# Altium PCB PCB2.PcbDoc
Units mil, origin at the board's own origin, x right, y up, seen from the top; angles counter-clockwise.
Board outline 6000 x 4000 mil, 2 copper layers (Top Layer, Bottom Layer); 72 components, 143 nets, 481 pads, 208 vias.
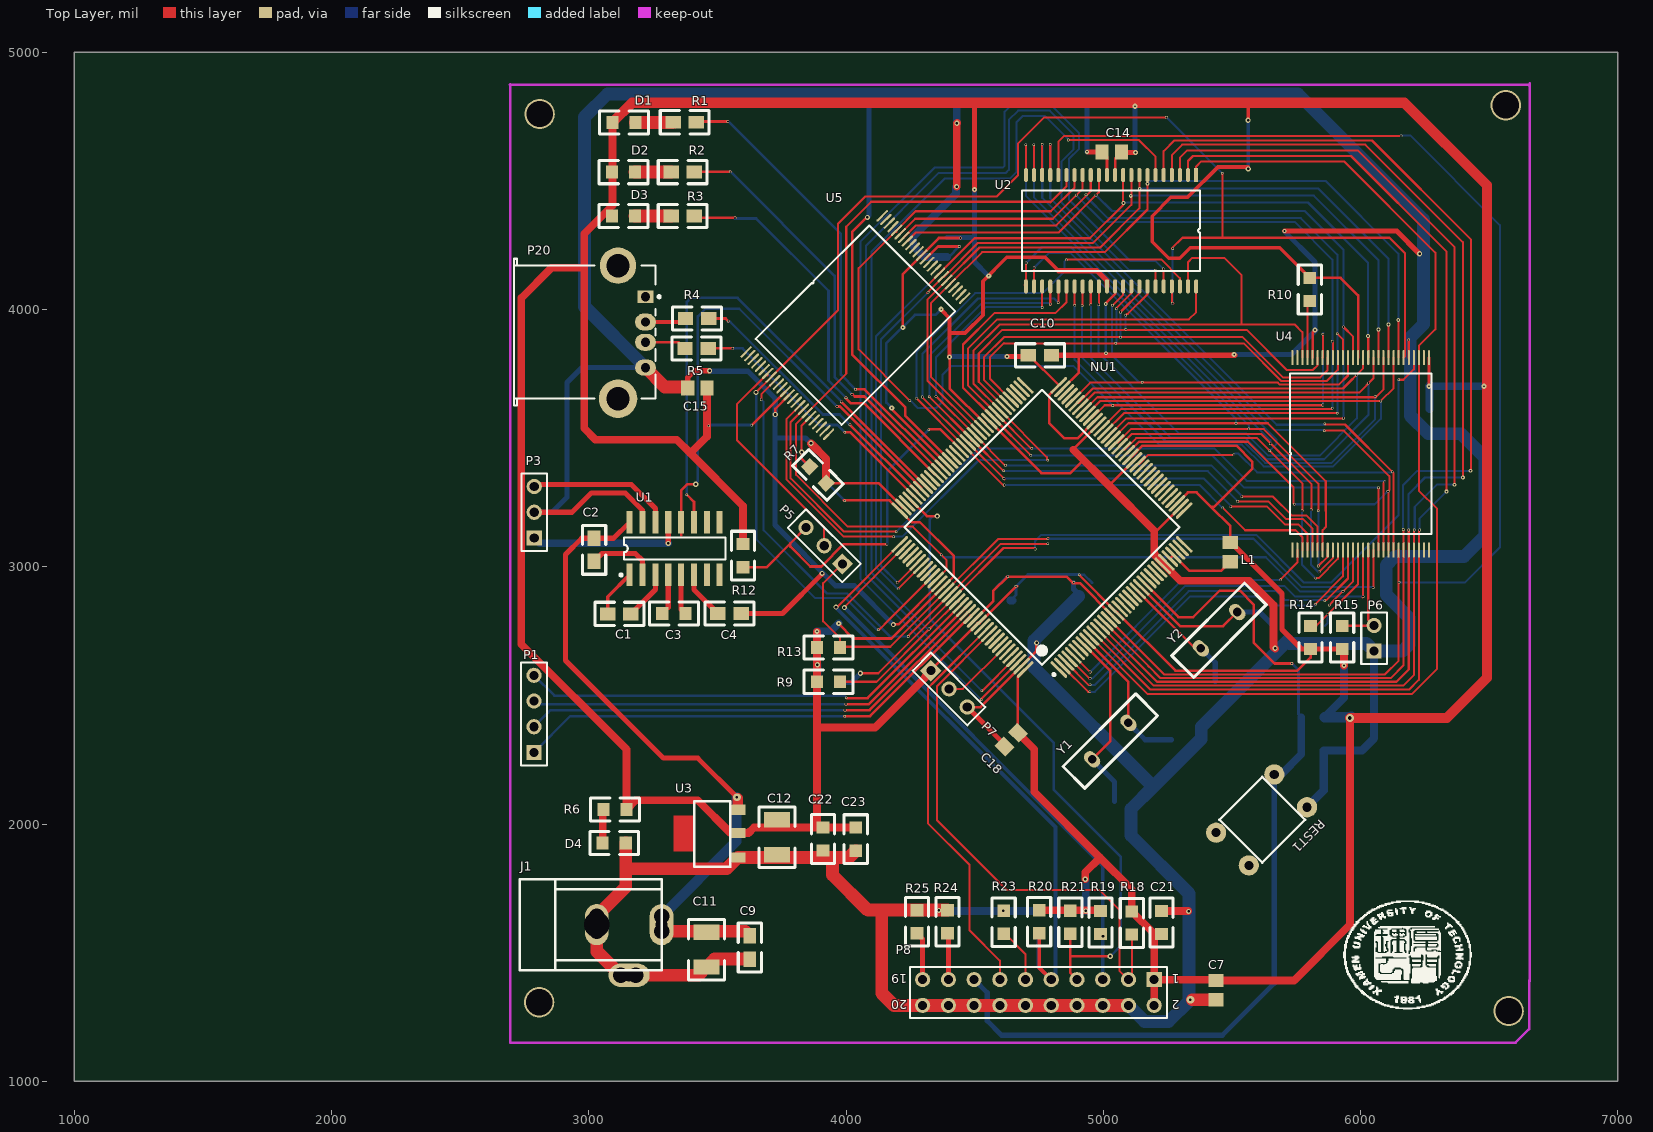
[diagram p0: Top Layer view]
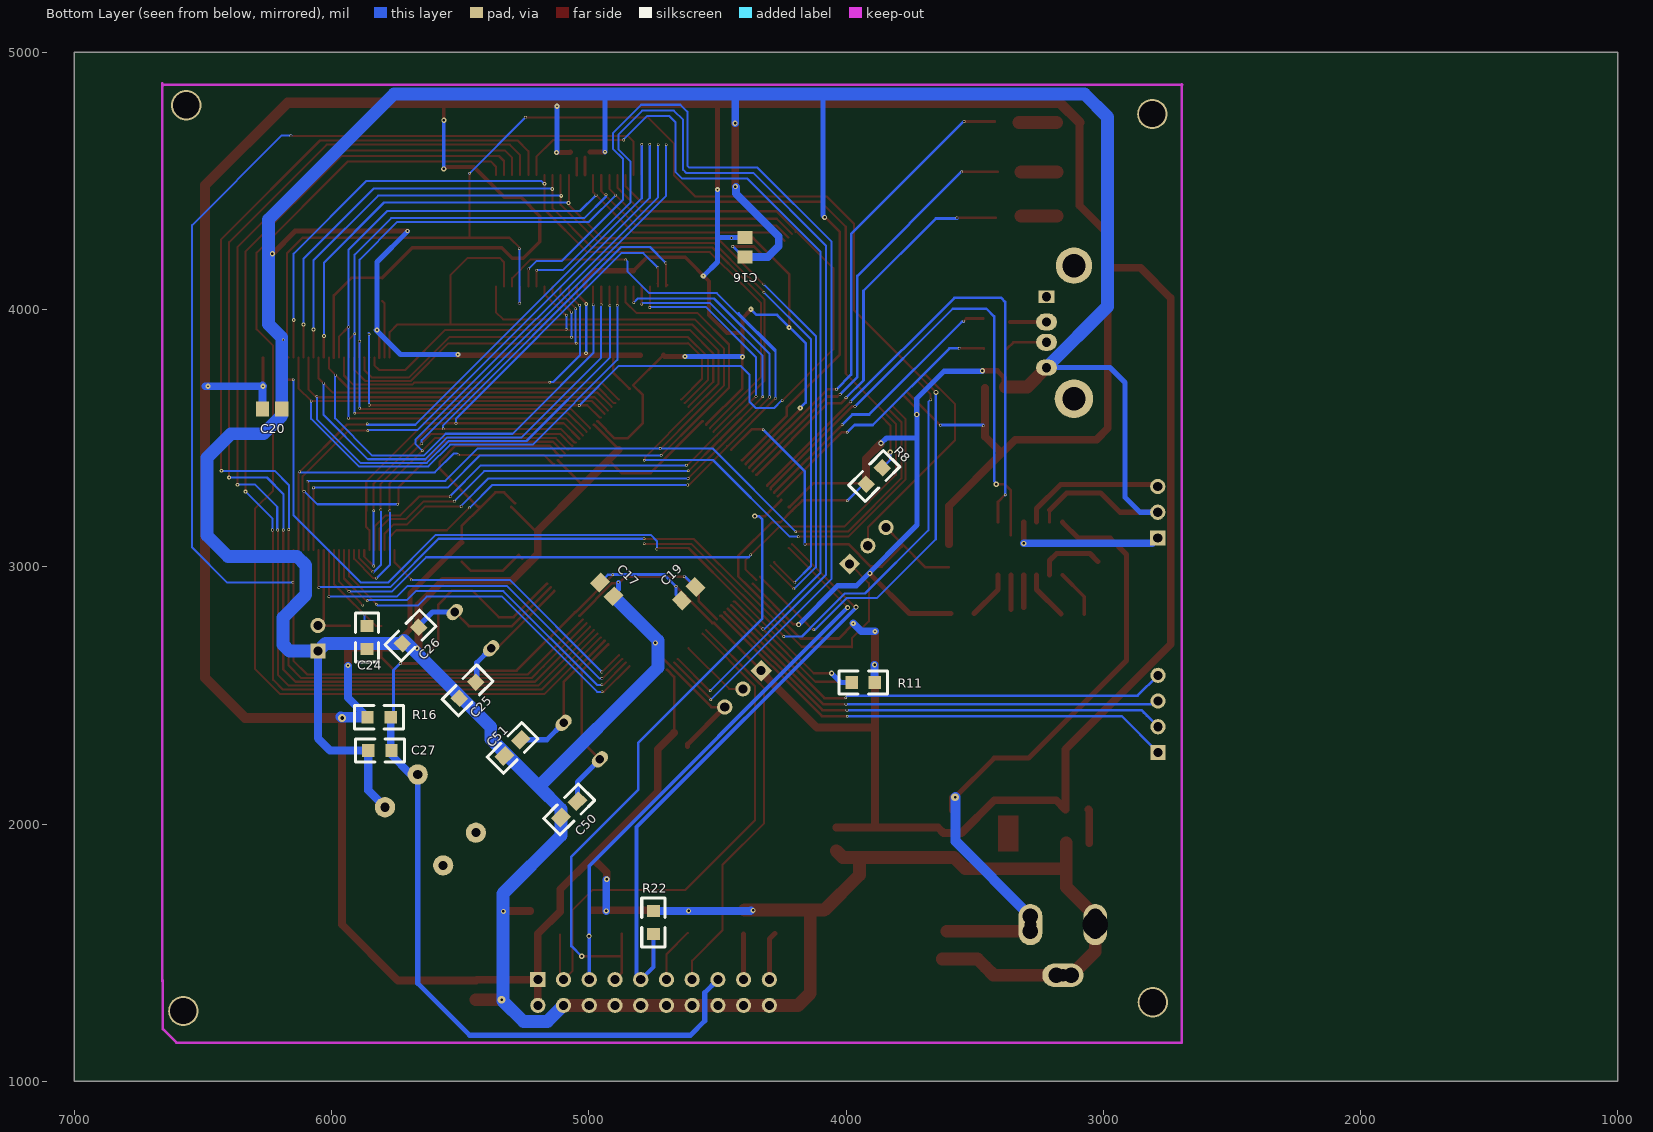
[diagram p1: Bottom Layer view, seen from below]

## Layer stack, top to bottom
Top Layer: signal copper 1.4
Dielectric: core 12.6, FR-4, Dk 4.8
Bottom Layer: signal copper 1.4

## Board outline
1000,1000 7000,1000 7000,5000 1000,5000

## Design rules (kind name [scope] priority, off if disabled: settings)
Clearance [All] p1: gap=6
FabricationTestPointUsage TestPointUsage [All] p1: valid=0 allowmultiple=FALSE
FabricationTestpoint Testpoint [All] p1: side=3 testpointundercomponent=TRUE minsize=40 maxsize=100 preferedsize=60 minholesize=0 maxholesize=40 preferedholesize=32 testpointgrid=1 allowsidetop=TRUE allowsidebottom=TRUE usegrid=TRUE gridtolerance=0.01
PolygonConnect [All] p1: connectstyle=Relief reliefconductorwidth=10 reliefentries=4 polygonreliefangle="90 Angle" airgapwidth=10
RoutingVias [All] p1: holewidth=28 width=50 viastyle="Through Hole" minholewidth=28 minwidth=50 maxholewidth=28 maxwidth=50
SolderMaskExpansion [All] p1: expansion=4
Width [All] p1: maxlimit=50 minlimit=6 preferedwidth=10 minimp=50.000000 maximp=50.000000 favimp=50.000000
26 further rules are at their usual default settings.

## Classes and differential pairs
net class R3_Nets: NetD3_2 PC8
net class R2_Nets: NetD2_2 PC7
net class R1_Nets: NetD1_2 PC6
net class R19_Nets: PA15 VDD33
net class U4_Nets: A0 A1 A2 A3 A4 A5 A6 A7 A8 A9 A10 A11 A12 A13 A14 A15 A16 A17 A18 A19 A20 A21 A22 D0 D1 D2 D3 D4 D5 D6 D7 D8 D9 D10 D11 D12 D13 D14 D15 GND NetC24_1 NetP6_2 NetR10_1 NetU4_1 NetU4_27 NetU4_28 NetU4_30 NetU4_55 NetU4_56 PD4 PD5 PD6 PG9 VDD33
net class D[0..15]: AD0 AD1 AD2 AD3 AD4 AD5 AD6 AD7 AD8 AD9 AD10 AD11 AD12 AD13 AD14 AD15 AD16 AD17 AD18 AD19 AD20 AD21 AD22 AD23 D0 D1 D2 D3 D4 D5 D6 D7 D8 D9 D10 D11 D12 D13 D14 D15 DATA0 DATA1 DATA2 DATA3 DATA4 DATA5 DATA6 DATA7 DATA8 DATA9 DATA10 DATA11 DATA12 DATA13 DATA14 DATA15 NetU4_1 NetU4_27 NetU4_28 NetU4_30 NetU4_55 NetU4_56
net class U5_Nets: A16 A17 D0 D1 D2 D3 D4 D5 D6 D7 GND NetP5_2 NetR7_1 PD4 PD5 PD7 VDD33
net class A[0..23]: A0 A1 A2 A3 A4 A5 A6 A7 A8 A9 A10 A11 A12 A13 A14 A15 A16 A17 A18 A19 A20 A21 A22 A23 NetU4_1 NetU4_27 NetU4_28 NetU4_30 NetU4_55 NetU4_56
net class U3_Nets: GND VDD5 VDD33
net class U2_Nets: A0 A1 A2 A3 A4 A5 A6 A7 A8 A9 A10 A11 A12 A13 A14 A15 A16 A17 A18 D0 D1 D2 D3 D4 D5 D6 D7 D8 D9 D10 D11 D12 D13 D14 D15 GND PD4 PD5 PE0 PE1 PG10 VDD33
net class REST1_Nets: GND NRST
net class R25_Nets: GND NetP8_19
net class R24_Nets: GND NetP8_17
net class R23_Nets: GND NetP8_11
net class R22_Nets: GND PA14
net class R21_Nets: PA13 VDD33
net class R20_Nets: PA14 VDD33
net class R18_Nets: PB4 VDD33
net class R16_Nets: NRST VDD33
net class R15_Nets: NetP6_2 VDD33
net class R14_Nets: NetC24_1 VDD33
net class R13_Nets: PD6 VDD33
net class R12_Nets: PG6 VDD33
net class R11_Nets: PG9 VDD33
net class R10_Nets: NetR10_1 VDD33
net class R9_Nets: PG10 VDD33
net class R8_Nets: NetR7_1 VDD33
net class R7_Nets: GND NetR7_1
net class R6_Nets: NetD4_1 VDD33
net class R5_Nets: NetP20_3 PA12
net class R4_Nets: NetP20_2 PA11
net class P20_Nets: GND NetP20_2 NetP20_3 NetP20_5 NetP20_6 "USB 5V"
net class P8_Nets: GND NetP8_11 NetP8_17 NetP8_19 NRST PA13 PA14 PA15 PB3 PB4 VDD33
net class P7_Nets: BOOT0 GND VDD33
net class P6_Nets: GND NetP6_2
net class P5_Nets: NetP5_2 PD6 PG6
net class P3_Nets: GND R1IN T1OUT
net class NU1_Nets: A0 A1 A2 A3 A4 A5 A6 A7 A8 A9 A10 A11 A12 A13 A14 A15 A16 A17 A18 A19 A20 A21 A22 A23 BOOT0 D0 D1 D2 D3 D4 D5 D6 D7 D8 D9 D10 D11 D12 D13 D14 D15 GND LED0 LED1 LED2 NetL1_1 NetNU1_6 NetNU1_106 NRST OSCIN OSCOUT PA0 PA1 PA2 PA3 PA4 PA5 PA6 PA7 PA8 PA9 PA10 PA11 PA12 PA13 PA14 PA15 PB0 PB1 PB2 PB3 PB4 PB5 PB6 PB7 PB8 PB9 PB10 PB11 PB12 PB13 PB14 PB15 PC0 PC1 PC2 PC3 PC4 PC5 PC6 PC7 PC8 PC9 PC10 PC11 PC12 PC13 PC14 PC15 PD2 PD3 PD4 PD5 PD6 PD7 PE0 PE1 PF6 PF10 PF11 PG6 PG7 PG8 PG9 PG10 PG11 PG12 PG13 PG14 PG15 VDD33
net class L1_Nets: NetL1_1 VDD33
net class J1_Nets: GND VDD5
net class D4_Nets: GND NetD4_1
net class D3_Nets: NetD3_2 VDD33
net class D2_Nets: NetD2_2 VDD33
net class D1_Nets: NetD1_2 VDD33
net class C27_Nets: GND NRST
net class C25_Nets: GND OSCIN
net class C24_Nets: GND NetC24_1
net class C23_Nets: GND VDD33
net class C22_Nets: GND VDD33
net class C21_Nets: GND VDD33
net class C20_Nets: GND VDD33
net class C19_Nets: GND VDD33
net class C18_Nets: GND VDD33
net class C17_Nets: GND VDD33
net class C16_Nets: GND VDD33
net class C15_Nets: GND VDD33
net class C14_Nets: GND VDD33
net class C12_Nets: GND VDD33
net class C11_Nets: GND VDD5
net class C10_Nets: GND VDD33
net class C9_Nets: GND VDD5
net class C7_Nets: GND VDD33
net class C3_Nets: NetC3_1 NetC3_2
net class C1_Nets: NetC1_1 NetC1_2
component class "XLAT AND JTAG": C25 C26 C27 P7 P8 R16 R18 R19 R20 R21 R22 R23 R24 R25 REST1 Y2
component class STORAGE: C21 C22 C23 C24 P5 P6 R7 R8 R9 R10 R11 R12 R13 R14 R15 U2 U4 U5
component class POWER: C7 C9 C10 C11 C12 C14 C15 C16 C17 C18 C19 C20 D4 J1 L1 NU1 R6 U3
component class EXTERN: 1 C1 C2 C3 C4 D1 D2 D3 P1 P3 P20 R1 R2 R3 R4 R5 U1
net class C2_Nets: NetC2_2 VDD5
net class C4_Nets: GND NetC4_1
net class U1_Nets: GND NetC1_1 NetC1_2 NetC2_2 NetC3_1 NetC3_2 NetC4_1 NetU1_7 NetU1_8 NetU1_9 NetU1_10 PA9 PA10 R1IN T1OUT VDD5
net class C26_Nets: GND OSCOUT
net class Y2_Nets: OSCIN OSCOUT
component class GPIO_OUT: C50 C51 Y1
net class C50_Nets: GND PC14
net class C51_Nets: GND PC15
net class Y1_Nets: PC14 PC15
net class P1_Nets: PG11 PG12 PG13 PG14

## Components (designator, comment, footprint, x,y, rotation, side; value= is the part's Value field where it differs from the comment)
C1 "0.1uF" 0805#1 3074,2817 r0 top
C2 "0.1uF" 0805#1 3021,3111 r270 top
C3 "0.1uF" 0805#2 3376,2818 r180 top
C4 "0.1uF" 0805#1 3502,2818 r0 top
C7 "Cap" 6-0805 5438,1354 r90 top
C9 "102" 0805#1 3626,1565 r270 top
C10 "102" 0805#1 4709,3822 r0 top
C11 "2.2uf" 1210 3458,1579 r270 top
C12 "2.2uf" 1210 3732,2016 r270 top
C14 "Cap" 6-0805 5033,4612 r0 top
C15 "Cap" 6-0805 3422,3695 r0 top
C16 "Cap" 6-0805 4393,4242 r90 bottom
C17 "Cap" 6-0805 4930,2912 r45 bottom
C18 "Cap" 6-0805 4642,2328 r45 top
C19 "Cap" 6-0805 4612,2895 r315 bottom
C20 "Cap" 6-0805 6231,3613 r0 bottom
C21 "Cap" 0805#2 5227,1572 r90 top
C22 "Cap" 0805#2 3911,1987 r270 top
C23 "Cap" 0805#2 4038,1986 r270 top
C24 "Cap" 0805#2 5862,2770 r270 bottom
C25 "Cap" 0805#2 5503,2488 r135 bottom
C26 "Cap" 0805#2 5725,2701 r135 bottom
C27 "Cap" 0805#2 5857,2286 r180 bottom
C50 "Cap" 0805#1 5108,2025 r135 bottom
C51 "Cap" 0805#1 5328,2264 r135 bottom
D1 "LED0" 0805#2 3092,4727 r0 top
D2 "LED0" 0805#2 3090,4534 r0 top
D3 "LED0" 0805#2 3090,4364 r0 top
D4 "LED3" 0805#2 3054,1926 r0 top
J1 "PWR2.5" Power_In 3013,1699 r0 top
L1 "Inductor" 6-0805 5494,3057 r90 top
NU1 "STM32F103ZET6" LQFN144 4762,3153 r135 top
P1 "Header 4" HDR1X4 2787,2278 r90 top
P3 "Header 3" HDR1X3 2788,3112 r90 top
P5 "Header 3" HDR1X3 3986,3011 r135 top
P6 "Header 2" HDR1X2 6053,2672 r90 top
P7 "Header 3" HDR1X3 4330,2596 r315 top
P8 "Header 10X2" HDR2X10 5198,1395 r180 top
P20 "P10" 787616 2709,3912 r180 top
R1 "Res2" 0805#1 3418,4728 r180 top
R2 "Res2" 0805#1 3410,4534 r180 top
R3 "Res2" 0805#1 3410,4364 r180 top
R4 "Res2" 0805#1 3376,3965 r0 top
R5 "Res2" 0805#1 3374,3848 r0 top
R6 "Res2" 0805#2 3057,2056 r0 top
R7 "Res2" 0805#2 3859,3389 r315 top
R8 "Res2" 0805#2 3922,3321 r135 bottom
R9 "Res2" 0805#2 3977,2553 r180 top
R10 "Res2" 0805#2 5803,4033 r90 top
R11 "Res2" 0805#2 3978,2550 r180 bottom
R12 "Res2" 0805#2 3600,2998 r90 top
R13 "Res2" 0805#2 3887,2686 r0 top
R14 "Res2" 0805#2 5806,2680 r90 top
R15 "Res2" 0805#2 5929,2680 r90 top
R16 "Res2" 0805#2 5770,2415 r0 bottom
R18 "Res2" 0805#2 5111,1570 r90 top
R19 "Res2" 0805#2 4989,1572 r90 top
R20 "Res2" 0805#2 4751,1575 r90 top
R21 "Res2" 0805#2 4872,1573 r90 top
R22 "Res2" 0805#2 4749,1572 r90 bottom
R23 "Res2" 0805#2 4613,1573 r90 top
R24 "Res2" 0805#2 4395,1575 r90 top
R25 "Res2" 0805#2 4276,1575 r90 top
REST1 "SW_PB" SWPB 5566,1839 r225 top
U1 "MAX232-2" SOIC16 3334,3071 r0 top
U2 "IS61LV51216-10T" TSOP44 5361,4523 r270 top
U3 "LM1117-3.3" SOT-223 3410,1833 r90 top
U4 "M29W128GL" TSOP56 5735,3065 r90 top
U5 "NAND512W3A2CN6E" TSOP48 3612,3835 r45 top
Y1 "XTAL" XTAL-1 5098,2393 r225 top
Y2 "XTAL" XTAL-1 5521,2824 r225 top
? "" BMP1 5935,1705 r0 top

## Footprints (in the part's own frame and the unit in brackets; to place one, negate y for a bottom-side part, rotate by r counter-clockwise, add the part's x,y. Pads: shape width x height; smd on the part's side, far side on the other; paste and mask are expansions set on the pad)
6-0805 [mm] "Chip Resistor; Body 2.0 x 1.3 mm (LxW typ)"
  rect 1.3x1.5 smd: 1(-0.95,0) 2(0.95,0)
0805#1 [mil]
  rect 60x50 smd: 1(0,0) 2(90,0)
  silkscreen extent -50,-45 140,45
0805#2 [mil]
  rect 47.37x50 smd: 1(0,0) 2(90,0)
  silkscreen extent -50,-45 140,45
1210 [mil]
  rect 60x100 smd: 1(0,0) 2(135,0)
  silkscreen extent -50,-70 185,70
787616 [mm] "Connector; USB1.1, Type A, Thru-Hole; 4 Position; Right Angle"
  rect 1.606x1.2 hole 0.92: 1(-12.99,-3.5)
  oval 2.057x1.676 hole 0.92: 2(-12.99,-1) 3(-12.99,1)
  oval 2.057x1.6 hole 0.92: 4(-12.99,3.5)
  round 3.8 hole 2.3: 5(-10.28,6.57)
  round 3.6 hole 2.3: 6(-10.28,-6.57)
  silkscreen extent -14.47,-7.25 0,7.25
BMP1 [mil]
  silkscreen extent 0,-424 498,-4
HDR1X2 [mm] "Connector; Header; 2 Position"
  rect 1.5x1.5 hole 0.9: 1(0,0)
  round 1.5 hole 0.9: 2(2.54,0)
  silkscreen extent -1.27,-1.27 3.81,1.27
HDR1X3 [mm] "Connector; Header; 3 Position"
  rect 1.5x1.5 hole 0.9: 1(0,0)
  round 1.5 hole 0.9: 2(2.54,0) 3(5.08,0)
  silkscreen extent -1.27,-1.27 6.35,1.27
HDR1X4 [mm] "Connector; Header; 4 Position"
  rect 1.5x1.5 hole 0.9: 1(0,0)
  round 1.5 hole 0.9: 2(2.54,0) 3(5.08,0) 4(7.62,0)
  silkscreen extent -1.27,-1.27 8.89,1.27
HDR2X10 [mm] "Connector; Header; 10x2 Position"
  rect 1.5x1.5 hole 0.9: 1(0,0)
  round 1.5 hole 0.9: 2(0,2.54) 3(2.54,0) 4(2.54,2.54) 5(5.08,0) 6(5.08,2.54) 7(7.62,0) 8(7.62,2.54) 9(10.16,0) 10(10.16,2.54) 11(12.7,0) 12(12.7,2.54) 13(15.24,0) 14(15.24,2.54) 15(17.78,0) 16(17.78,2.54) 17(20.32,0) 18(20.32,2.54) 19(22.86,0) 20(22.86,2.54)
  silkscreen extent -1.27,-1.27 24.13,3.81
LQFN144 [mm] "TSQFP, 144-Leads, Body 23.8x23.8mm (max), Pitch 0.50mm, IPC Medium Density"
  oval 2.2x0.3 smd: 1(-11.1,8.75) 2(-11.1,8.25) 3(-11.1,7.75) 4(-11.1,7.25) 5(-11.1,6.75) 6(-11.1,6.25) 7(-11.1,5.75) 8(-11.1,5.25) 9(-11.1,4.75) 10(-11.1,4.25) 11(-11.1,3.75) 12(-11.1,3.25) 13(-11.1,2.75) 14(-11.1,2.25) 15(-11.1,1.75) 16(-11.1,1.25) 17(-11.1,0.75) 18(-11.1,0.25) 19(-11.1,-0.25) 20(-11.1,-0.75) 21(-11.1,-1.25) 22(-11.1,-1.75) 23(-11.1,-2.25) 24(-11.1,-2.75) 25(-11.1,-3.25) 26(-11.1,-3.75) 27(-11.1,-4.25) 28(-11.1,-4.75) 29(-11.1,-5.25) 30(-11.1,-5.75) 31(-11.1,-6.25) 32(-11.1,-6.75) 33(-11.1,-7.25) 34(-11.1,-7.75) 35(-11.1,-8.25) 36(-11.1,-8.75) 73(11.1,-8.75) 74(11.1,-8.25) 75(11.1,-7.75) 76(11.1,-7.25) 77(11.1,-6.75) 78(11.1,-6.25) 79(11.1,-5.75) 80(11.1,-5.25) 81(11.1,-4.75) 82(11.1,-4.25) 83(11.1,-3.75) 84(11.1,-3.25) 85(11.1,-2.75) 86(11.1,-2.25) 87(11.1,-1.75) 88(11.1,-1.25) 89(11.1,-0.75) 90(11.1,-0.25) 91(11.1,0.25) 92(11.1,0.75) 93(11.1,1.25) 94(11.1,1.75) 95(11.1,2.25) 96(11.1,2.75) 97(11.1,3.25) 98(11.1,3.75) 99(11.1,4.25) 100(11.1,4.75) 101(11.1,5.25) 102(11.1,5.75) 103(11.1,6.25) 104(11.1,6.75) 105(11.1,7.25) 106(11.1,7.75) 107(11.1,8.25) 108(11.1,8.75)
  oval 0.3x2.2 smd: 37(-8.75,-11.1) 38(-8.25,-11.1) 39(-7.75,-11.1) 40(-7.25,-11.1) 41(-6.75,-11.1) 42(-6.25,-11.1) 43(-5.75,-11.1) 44(-5.25,-11.1) 45(-4.75,-11.1) 46(-4.25,-11.1) 47(-3.75,-11.1) 48(-3.25,-11.1) 49(-2.75,-11.1) 50(-2.25,-11.1) 51(-1.75,-11.1) 52(-1.25,-11.1) 53(-0.75,-11.1) 54(-0.25,-11.1) 55(0.25,-11.1) 56(0.75,-11.1) 57(1.25,-11.1) 58(1.75,-11.1) 59(2.25,-11.1) 60(2.75,-11.1) 61(3.25,-11.1) 62(3.75,-11.1) 63(4.25,-11.1) 64(4.75,-11.1) 65(5.25,-11.1) 66(5.75,-11.1) 67(6.25,-11.1) 68(6.75,-11.1) 69(7.25,-11.1) 70(7.75,-11.1) 71(8.25,-11.1) 72(8.75,-11.1) 109(8.75,11.1) 110(8.25,11.1) 111(7.75,11.1) 112(7.25,11.1) 113(6.75,11.1) 114(6.25,11.1) 115(5.75,11.1) 116(5.25,11.1) 117(4.75,11.1) 118(4.25,11.1) 119(3.75,11.1) 120(3.25,11.1) 121(2.75,11.1) 122(2.25,11.1) 123(1.75,11.1) 124(1.25,11.1) 125(0.75,11.1) 126(0.25,11.1) 127(-0.25,11.1) 128(-0.75,11.1) 129(-1.25,11.1) 130(-1.75,11.1) 131(-2.25,11.1) 132(-2.75,11.1) 133(-3.25,11.1) 134(-3.75,11.1) 135(-4.25,11.1) 136(-4.75,11.1) 137(-5.25,11.1) 138(-5.75,11.1) 139(-6.25,11.1) 140(-6.75,11.1) 141(-7.25,11.1) 142(-7.75,11.1) 143(-8.25,11.1) 144(-8.75,11.1)
  silkscreen extent -11.22,-9.6 9.6,9.6, body extent -10,-10 10,10, height 1.6
Power_In [mil]
  rect 60x60 hole 60: 1(270,-116) 2(170,-287) 3(18,-57)
  oval 92x160 hole 47: 1(270,-90)
  rect 50x60 hole 60: 1(270,-57) 3(18,-116)
  rect 60x50 hole 60: 2(111,-287)
  oval 160x92 hole 47: 2(144,-287)
  oval 92x160 hole 100: 3(18,-90)
  silkscreen extent -281,-267 270,87
SOIC16 [mm]
  rect 0.6x2.2 smd: 1(-4.445,-2.6) 2(-3.175,-2.6) 3(-1.905,-2.6) 4(-0.635,-2.6) 5(0.635,-2.6) 6(1.905,-2.6) 7(3.175,-2.6) 8(4.445,-2.6) 9(4.445,2.6) 10(3.175,2.6) 11(1.905,2.6) 12(0.635,2.6) 13(-0.635,2.6) 14(-1.905,2.6) 15(-3.175,2.6) 16(-4.445,2.6)
  silkscreen extent -5.42,-2.72 5,1.1
SOT-223 [mm]
  rect 1x1.5 smd: 1(0.95,-4.31) 2(3.35,-4.31) 3(5.65,-4.31)
  Top Layer region: 1.524,0 5.08,0 5.08,2.032 1.524,2.032
  silkscreen extent 0,-3.56 6.5,0
SWPB [mm]
  round 2 hole 0.9: 1(-8.128,0) 2(-8.128,-4.572) 3(0,-4.572) 4(0,0)
  silkscreen extent -7.13,-5.25 -1.13,0.75
TSOP44 [mm]
  rect 1.4x0.4 smd: 1(0,0)
  oval 1.4x0.4 smd: 2(0,-0.8) 3(0,-1.6) 4(0,-2.4) 5(0,-3.2) 6(0,-4) 7(0,-4.8) 8(0,-5.6) 9(0,-6.4) 10(0,-7.2) 11(0,-8) 12(0,-8.8) 13(0,-9.6) 14(0,-10.4) 15(0,-11.2) 16(0,-12) 17(0,-12.8) 18(0,-13.6) 19(0,-14.4) 20(0,-15.2) 21(0,-16) 22(0,-16.8) 23(11,-16.8) 24(11,-16) 25(11,-15.2) 26(11,-14.4) 27(11,-13.6) 28(11,-12.8) 29(11,-12) 30(11,-11.2) 31(11,-10.4) 32(11,-9.6) 33(11,-8.8) 34(11,-8) 35(11,-7.2) 36(11,-6.4) 37(11,-5.6) 38(11,-4.8) 39(11,-4) 40(11,-3.2) 41(11,-2.4) 42(11,-1.6) 43(11,-0.8) 44(11,0)
  silkscreen extent 1.53,-17.2 9.47,0.4
TSOP48 [mm]
  rect 1.5x0.22 smd: 1(0,0)
  oval 1.5x0.22 smd: 2(0,-0.5) 3(0,-1) 4(0,-1.5) 5(0,-2) 6(0,-2.5) 7(0,-3) 8(0,-3.5) 9(0,-4) 10(0,-4.5) 11(0,-5) 12(0,-5.5) 13(0,-6) 14(0,-6.5) 15(0,-7) 16(0,-7.5) 17(0,-8) 18(0,-8.5) 19(0,-9) 20(0,-9.5) 21(0,-10) 22(0,-10.5) 23(0,-11) 24(0,-11.5) 25(19,-11.5) 26(19,-11) 27(19,-10.5) 28(19,-10) 29(19,-9.5) 30(19,-9) 31(19,-8.5) 32(19,-8) 33(19,-7.5) 34(19,-7) 35(19,-6.5) 36(19,-6) 37(19,-5.5) 38(19,-5) 39(19,-4.5) 40(19,-4) 41(19,-3.5) 42(19,-3) 43(19,-2.5) 44(19,-2) 45(19,-1.5) 46(19,-1) 47(19,-0.5) 48(19,0)
  silkscreen extent 1.58,-11.75 17.42,0.25
TSOP56 [mm]
  rect 1.5x0.2 smd: 1(0,0)
  oval 1.5x0.2 smd: 2(0,-0.5) 3(0,-1) 4(0,-1.5) 5(0,-2) 6(0,-2.5) 7(0,-3) 8(0,-3.5) 9(0,-4) 10(0,-4.5) 11(0,-5) 12(0,-5.5) 13(0,-6) 14(0,-6.5) 15(0,-7) 16(0,-7.5) 17(0,-8) 18(0,-8.5) 19(0,-9) 20(0,-9.5) 21(0,-10) 22(0,-10.5) 23(0,-11) 24(0,-11.5) 25(0,-12) 26(0,-12.5) 27(0,-13) 28(0,-13.5) 29(19,-13.5) 30(19,-13) 31(19,-12.5) 32(19,-12) 33(19,-11.5) 34(19,-11) 35(19,-10.5) 36(19,-10) 37(19,-9.5) 38(19,-9) 39(19,-8.5) 40(19,-8) 41(19,-7.5) 42(19,-7) 43(19,-6.5) 44(19,-6) 45(19,-5.5) 46(19,-5) 47(19,-4.5) 48(19,-4) 49(19,-3.5) 50(19,-3) 51(19,-2.5) 52(19,-2) 53(19,-1.5) 54(19,-1) 55(19,-0.5) 56(19,0)
  silkscreen extent 1.58,-13.75 17.42,0.25
XTAL-1 [mm]
  oval 1.203x1.8 hole 0.85: 1(0,0) 2(5.08,0)
  silkscreen extent -2.54,-1.52 7.62,1.52

## Part data
C1 C2 C3 C4 C9 C10 C11 C12: library part CAP, "Capacitor"
C7 C14 C15 C16 C17 C18 C19 C20 C21 C22 C23 C24 C25 C26 C27 C50 C51: "Capacitor"
D1 D2 D3: "Typical INFRARED GaAs LED"
D4: "Typical BLUE SiC LED"
J1: "Low Voltage Power Supply Connector"
P1: "Header, 4-Pin"
P3 P5 P7: "Header, 3-Pin"
P6: "Header, 2-Pin"
P8: "Header, 10-Pin, Dual row"
P20: library part COMPONENT_1
R1 R2 R3 R4 R5 R6 R7 R8 R9 R10 R11 R12 R13 R14 R15 R16 R18 R19 R20 R21 R22 R23 R24 R25: "Resistor"
U1: library part MAX3232-2
Y1 Y2: "Crystal Oscillator"

## Free pads (board coordinates)
  round 118.11 hole 102.36: 0(6565,4794) 1(6576,1273) 2(2809,4760) 3(2807,1307)

## Via types
v1: diameter 10, hole 7, Top Layer to Bottom Layer, 144 vias
v2: diameter 20, hole 10, Top Layer to Bottom Layer, 29 vias
v3: diameter 15, hole 7, Top Layer to Bottom Layer, 16 vias
v4: diameter 20, hole 7, Top Layer to Bottom Layer, 16 vias
v5: diameter 30, hole 10, Top Layer to Bottom Layer, 2 vias
v6: diameter 30, hole 14, Top Layer to Bottom Layer, 1 vias

## Nets (pads, with @x,y where several pads share a name; then routed paths per layer and width w, separated by ;. In a path a pad name is that pad's centre, name@x,y a point inside that pad or via, vN(x,y) a via of type N, cw(c..) or ccw(c..) an arc to the next point about the centre after c; other vN are vias at no path point)
A0: NU1.10 U2.1 U4.31 | length 4269.4
  Top Layer w8: NU1.10 5173.37,2505 6200,2505 6298,2603 6298,3225 6227.12,3295.88 U4.31 6227.12,3859.12 6291,3923 6291,4221 5936,4576 5381,4576 5361,4556 U2.1
A1: NU1.11 U2.2 U4.26 | length 4300.1
  Top Layer w8: NU1.11 5183.21,2523 6190,2523 6227.12,2560.12 U4.26 6227.12,3140.12 v1(6230,3143) ; U2.2 5329.5,4577.5 5349,4597 5963,4597 6333.69,4226.31 v3@6333.69,3290.32
  Bottom Layer w8: v1@6230,3141 v1(6230,3143) 6230,3188 v3(6334,3292)
A2: NU1.12 U2.3 U4.25 | length 4406.2
  Top Layer w8: NU1.12 5146.52,2587.52 ; 5151,2583.05 5146.52,2587.52 ; U2.3 5298.01,4590.01 5327,4619 5989,4619 6366,4242 v3@6366,3320 ; v1@6207.44,3141.44 U4.25 6207.44,2578.44 6168,2539 5195.05,2539 5146.52,2587.52
  Bottom Layer w8: v1@6211,3143 6211,3233 6297,3319 v3(6365,3319)
  other v1: 6209,3143
A3: NU1.13 U2.4 U4.24 | length 4520.5
  Top Layer w8: NU1.13 5208.89,2553 6140,2553 6187.76,2600.76 U4.24 6187.76,3142.76 v1(6188,3143) ; U2.4 5266.51,4600.51 5307,4641 6019,4641 6398,4262 v3(6398,3347)
  Bottom Layer w8: v1@6187,3142 6187,3283 6251,3347 v3(6398,3347)
A4: NU1.14 U2.5 U4.23 | length 4622.7
  Top Layer w8: NU1.14 5174.86,2614.86 ; 5178.73,2611 5174.86,2614.86 ; U2.5 5235.02,4616.02 5276,4657 6045,4657 6429,4273 v3@6429,3374 ; v1(6166,3145) 6168.07,3142.93 U4.23 6168.07,2618.07 6117,2567 5222.73,2567 5174.86,2614.86
  Bottom Layer w8: v1(6166,3145) 6166,3318 6221,3373 v3(6428,3373)
A5: NU1.15 U2.18 U4.22 | length 5368.4
  Top Layer w8: U2.18 4825.57,4651.57 4849,4675 v1(6158,4675) ; NU1.15 5236.56,2581 6094,2581 6148.39,2635.39 U4.22
  Bottom Layer w8: 6155,2938 6405,2938 6542,3075 6542,4328 6193,4677 v1@6159,4677 ; v1@6155,4677 v1@6159,4677 ; v1(6158,4675) 6158,4676 v1@6159,4677
  other v1: 6150,2940
A6: NU1.50 U2.19 U4.21 | length 3445
  Top Layer w8: U2.19 v1@4794.07,4642.07 ; NU1.50 5138.99,3399.37 5174.62,3435 v1(5508,3435) ; v1@5862,3553 5940,3553 v1(6124,3369) 6128.7,3364.3 U4.21
  Bottom Layer w8: v1(4794,4642) 4794,4432 5674,3552 v1@5862,3552 ; v1(5508,3435) 5514,3441 5524,3441 5598,3367 v1@6125,3367
  other v1: 5861,3556
A7: NU1.53 U2.20 U4.20 | length 3600.6
  Top Layer w8: U2.20 v1@4762.57,4642.43 ; NU1.53 5094.13,3441.13 5139,3486 5562,3486 5740,3308 5740,3246 v1(5743,3243) ; v1(5859,3529) 5935,3529 6112,3352 6112,3299 6107,3294 6109.02,3291.99 U4.20
  Bottom Layer w8: v1(4763,4642) 4763,4434 5666,3531 v1@5858,3531 ; v1(5743,3243) 6055,3243 v1@6104,3292
  other v1: 6107,3293
A8: NU1.54 U2.21 U4.10 | length 3037.6
  Top Layer w8: U2.21 v1@4731.08,4640.08 ; NU1.54 5083.32,3455.05 5128.26,3500 5598,3500 v1(5647,3451) 5774,3324 v1@5774,3218 ; v1(5826,2956) 5837.16,2956 5912.16,3031 U4.10
  Bottom Layer w8: v1(4730,4641) 4730,4437 5674,3493 5674,3478 v1(5647,3451) ; v1(5773,3217) 5773,3007 v1@5825,2955
A9: NU1.55 U2.22 U4.9 | length 2988.4
  Top Layer w8: U2.22 4699.58,4616 ; 4699.58,4623.58 4699.58,4616 ; v1@4699.58,4639.42 4699.58,4616 ; NU1.55@5064.05,3471.05 NU1.55 5111.08,3516 5615,3516 5810,3321 v1@5810,3221 ; v1(5839,2980) 5892.48,3033.48 U4.9
  Bottom Layer w8: v1(4699,4641) 4699,4443 5650,3492 v1@5650,3481 ; v1(5808,3221) 5808,3007 v1@5837,2978
  other v1: 5650,3479
A10: NU1.56 U2.23 U4.8 | length 2586.6
  Top Layer w8: U2.23@4695,4094.51 U2.23 v1@4699.58,4180.58 ; NU1.56 5055.48,3482.89 5107.59,3535 5624,3535 5836,3323 v1@5836,3219 ; v1(5836,3003) 5836.41,3003 5872.8,3039.38 U4.8
  Bottom Layer w8: v1(4700,4181) 4762,4243 4873,4243 5566,3550 v1(5566,3536) ; v1(5836,3003) 5836,3161 ; 5836,3156 5836,3161 ; v1(5836,3218) 5836,3161
A11: NU1.57 U2.24 U4.7 | length 2399.3
  Top Layer w8: v1@4731.08,4162.92 U2.24 4731.08,4099.92 U2.24@4733,4101.84 ; NU1.57 5097.4,3558 5640,3558 5865,3333 5865,3217 ; U4.7 5853.11,3142.11 5866,3155 5866,3216
  Bottom Layer w8: v1(4731,4162) 4788,4219 4873,4219 5516,3576 v1@5516,3557
  other v1: 5516,3558
A12: NU1.87 U2.25 U4.6 | length 2512.6
  Top Layer w8: v1@4350.44,3662 NU1.87 v1@4619.44,3393 ; v1@4762.57,4008.43 U2.25 ; v1(5538,3273) 5659.43,3273 5732.43,3200 5789,3200 5833.43,3155.57 U4.6
  Bottom Layer w8: v1(4350,3662) 4350,3815 4544,4009 v1@4764,4009 ; v1(4620,3395) 4621,3394 5420,3394 v1@5539,3275
  other v1: 4763,4008
A13: NU1.88 U2.26 U4.5 | length 2578.1
  Top Layer w8: v1@4323.6,3661 NU1.88 ; NU1.88@4487.79,3491.46 NU1.88 ; v1@4612.6,3372 NU1.88 ; v1@4794.07,4018.07 U2.26 ; v1(5522,3254) 5642,3254 5710,3186 5776,3186 5813.74,3148.26 U4.5
  Bottom Layer w8: v1(4324,3661) 4324,3821 4528,4025 4791,4025 ; v1(4613,3373) 5405,3373 ; 5408,3373 5405,3373 ; v1@5523,3255 5405,3373
  other v1: 4794,4021
A14: NU1.89 U2.27 U4.4 | length 2643.8
  Top Layer w8: v1@4297,3659.76 NU1.89 v1@4617,3339.76 ; v1@4825.57,4024.57 U2.27 ; v1(5495,3234) 5637,3234 5706,3165 5758,3165 5794.06,3128.95 U4.4
  Bottom Layer w8: v1(4297,3660) 4297,3827 4513,4043 4809,4043 v1(4825,4027) ; v1(4614,3343) 5391,3343 v1@5498,3236
A15: NU1.90 U2.42 U4.3 | length 3420.6
  Top Layer w8: v1@4274.92,3654 NU1.90 ; NU1.90@4462.03,3468.97 NU1.90 ; v1@4615,3317 4611.92,3317 NU1.90 ; v1(4856,4193) 4858,4195 5225,4195 5298.01,4121.99 U2.42 ; v1(5465,3229) 5552,3142 5748,3142 5774.37,3115.63 U4.3
  Bottom Layer w8: v1(4274,3654) 4274,3836 4274,3836.2 ; 4417,3986 4274,3843 4274,3836.2 ; v1(4616,3318) 5375,3318 v1@5463,3230 ; v1(4856,4193) 4850,4187 4850,4149 4765,4064 4501.8,4064 4274,3836.2
A16: NU1.80 U2.43 U4.54 U5.16 | length 4044.6
  Top Layer w8: U5.16 3768,3573.42 3768,3340 3991,3117 v1@4184,3117 ; v1@4781,3415 4781,3426.31 NU1.80 4495,3712.31 4495,3839 4598,3942 5538,3942 ; U2.43 5329.5,4184.5 5346,4201 5471,4201 5538,4134 5538,3942 ; U4.54 5774.37,3911.63 5744,3942 5538,3942
  Bottom Layer w8: v1(4185,3117) 4219,3117 4517,3415 4783,3415 v1(4784,3414)
A17: NU1.81 U2.44 U4.19 U5.17 | length 4681.8
  Top Layer w8: U5.17 3785,3562.58 3785,3344 3992,3137 v1@4195,3137 ; v1@4720.73,3458.73 NU1.81 4475,3704.47 4475,3849 4588,3962 5314,3962 ; 5318,3962 5314,3962 ; U2.44 5361,3990 5333,3962 5314,3962 ; U4.19 6089.33,3324.33 v1(6095,3330)
  Bottom Layer w8: v1(4195,3136) 4519,3460 v1(4722,3460) 5432,3460 5558,3334 6094,3334 v1@6094,3330
A18: NU1.82 U2.28 U4.18 | length 2720.5
  Top Layer w8: v1@4718.63,3433 NU1.82 4455,3696.63 4455,3864 4577,3986 4814,3986 4857.06,4029.06 U2.28 ; U4.18 6069.65,3304.64 v1@6071,3306
  Bottom Layer w8: v1(4718,3433) 5423,3433 5547,3309 6067,3309 v1@6072,3304
  other v1: 6070,3307
A19: NU1.2 U4.11 | length 1450.7
  Top Layer w8: NU1.2 4941.66,2514 v1(4948,2514) ; v1@5824,2855 5931.85,2962.85 U4.11
  Bottom Layer w8: v1(4948,2514) 4967,2514 5337,2884 5630,2884 5665,2849 5821,2849 v1(5826,2854)
A20: NU1.3 U4.12 | length 1443
  Top Layer w8: NU1.3 4942.5,2541 v1(4949,2541) ; v1@5862,2870 5867,2870 5951.53,2954.53 U4.12
  Bottom Layer w8: v1(4949,2541) 4968,2541 5332,2905 5451,2905 5672,2905 5707,2870 5859,2870 v1(5861,2868)
A21: NU1.4 U4.15 | length 1526.3
  Top Layer w8: NU1.4 v1@4945.34,2566 ; v1@6008,2881 6010.59,2883.59 U4.15
  Bottom Layer w8: v1(4949,2566) 4959,2566 5319,2926 5482,2926 ; 5488,2926 5482,2926 ; v1(6010,2884) 5746,2884 5704,2926 5482,2926
A22: NU1.5 U4.2 | length 1126.1
  Top Layer w8: NU1.5 v1@4951,2588.18 ; v1@5690,2952 5754.69,3016.68 U4.2
  Bottom Layer w8: v1(4949,2591) 5307,2949 v1(5690,2949) v1@5691,2949
A23: NU1.1
BOOT0: NU1.138 P7.2 | length 278.1
  Top Layer w8: P7.2 4454.44,2525.29 NU1.138
D0: NU1.85 U2.7 U4.35 U5.29 | length 3199.9
  Top Layer w8: NU1.85 4330,3738.11 4330,4024.06 U5.29 4528.94,4223 5006,4223 5172.02,4389.02 U2.7 ; U4.35 v3@6148.39,3959.61
  Bottom Layer w8: v3@5170,4486 5184,4500 5864,4500 6147,4217 v3(6147,3959)
  other v3: 5172,4489
D1: NU1.86 U2.8 U4.37 U5.30 | length 3164.1
  Top Layer w8: NU1.86 4316,3724.27 4316,4037.9 U5.30 4519.1,4241 4988,4241 5140.53,4393.53 U2.8 ; U4.37 v3@6109.02,3940.99
  Bottom Layer w8: v3@5140,4467 5143,4470 5837,4470 6109,4198 v3(6109,3942)
  other v3: 5142,4468
D2: NU1.114 U2.9 U4.39 U5.31 | length 3847
  Top Layer w8: v1@4198,2938 4201,2938 4279,3016 NU1.114 ; v1@4315,4065 4315.26,4065 U5.31 4381.31,4127.31 4513,4259 4961,4259 5109.03,4407.03 U2.9 ; U4.39 v3@6069.65,3923.64
  Bottom Layer w8: v1@4198,2937 4198,2941 4136,3003 4136,3884 v1(4319,4067) ; v3@5106,4443 5819,4443 6070,4192 v3(6070,3922)
  other v1: 4200,2939
  other v3: 5107,4442
D3: NU1.115 U2.10 U4.41 U5.32 | length 3846.4
  Top Layer w8: v1@4203.85,2915 NU1.115 ; v1(4319,4099) 4321.42,4099 U5.32 4499.42,4277 4948,4277 5077.53,4406.53 U2.10 ; U4.41 v3@6030.27,3896.28
  Bottom Layer w8: v1(4203,2914) 4201.2,2914 4117,2998.2 4117,3897 v1(4319,4099) ; v3@5082,4416 5796,4416 6029,4183 v3(6029,3897)
  other v3: 5079,4414
D4: NU1.58 U2.13 U4.44 U5.41 | length 3669.3
  Top Layer w8: U5.41 4272,4300.13 4827.87,4300.13 4983.05,4455.3 U2.13 ; NU1.58 5023.73,3510.73 5090,3577 5933,3577 v1(5934,3578) ; v1(5934,3932) 5971.22,3894.78 U4.44
  Bottom Layer w8: v1(4972,4445) 5034,4383 5784,4383 5934,4233 v1(5934,3932) v1(5934,3578)
D5: NU1.59 U2.14 U4.46 U5.42 | length 3595.1
  Top Layer w8: U5.42 4225.42,4280.42 4272,4327 4818,4327 4951.55,4460.55 U2.14 ; NU1.59 5080.73,3597 v1(5910,3597) v1@5911,3597 ; v1(5910,3906) 5931.85,3884.15 U4.46
  Bottom Layer w8: v1(4933,4446) 4933,4439.4 5017.4,4355 5768,4355 5910,4213 v1(5910,3906) ; v1(5910,3597) v1(5910,3906) ; v1@5910,3909 v1(5910,3906)
D6: NU1.60 U2.15 U4.48 U5.43 | length 3506.9
  Top Layer w8: U5.43 4269.19,4353 4804,4353 4920.05,4469.05 U2.15 ; NU1.60 5051.94,3596.06 ; 5054.89,3599 5051.94,3596.06 ; v1(5891,3616) 5888,3613 5782.2,3613 5781.2,3614 5069.89,3614 5051.94,3596.06 ; U4.48 v1@5892.48,3874.52
  Bottom Layer w8: v1(4895,4445) 4999,4341 5744,4341 5891,4194 v1(5891,3876) ; v1(5891,3616) v1@5891,3874
D7: NU1.63 U2.16 U4.50 U5.44 | length 3912.5
  Top Layer w8: 4196.62,4300.69 U5.44 ; v1(4248,3646) 4049,3845 4049,4160.64 U5.44 ; U2.16 4888.56,4474.56 4796,4382 4270.36,4382 U5.44 ; NU1.63 4958.04,3580.33 5005.72,3628 v1@5854,3628 ; U4.50 5854,3813.92 v1(5854,3904)
  Bottom Layer w8: v1@4250,3647 4280,3617 4350,3617 4375,3642 4375,3746 4410,3781 4883,3781 v1(5037,3627) ; v1(5854,3629) 5855,3630 5855,3883 ; 5855,3888 5855,3883 ; v1@5856,3908 5855,3908 5855,3883
D8: NU1.64 U2.29 U4.36 | length 3144.2
  Top Layer w8: v1@4888.56,4017.56 U2.29 ; NU1.64 4989.53,3645 6079,3645 6128.7,3694.7 U4.36
  Bottom Layer w8: v1(4889,4016) 4889,3804 5218,3475 5538.8,3475 5623.8,3390 5893.8,3390 6079,3575.2 v1@6079,3647
  other v1: 6079,3644
D9: NU1.65 U2.30 U4.38 | length 3067.2
  Top Layer w8: v1@4920.05,4014.95 U2.30 ; NU1.65 4926.17,3608.17 4977,3659 6060,3659 6089.33,3688.33 U4.38
  Bottom Layer w8: v1(4918,4015) 4918,3813 5242,3489 5544.6,3489 5629.6,3404 5888,3404 6056,3572 6056,3660 v1@6058,3662
  other v1: 6057,3663
D10: NU1.66 U2.31 U4.40 | length 2980.5
  Top Layer w8: NU1.66 4965.85,3677 5995,3677 6049.96,3731.96 U4.40 ; v1@4951.55,4018.45 U2.31
  Bottom Layer w8: v1(4952,4018) 4952,3812 5261,3503 5550.4,3503 5635.4,3418 5859,3418 6031,3590 v1(6031,3714)
D11: NU1.67 U2.32 U4.42 | length 2872.7
  Top Layer w8: NU1.67 4902.36,3636 4959.36,3693 5932,3693 6010.59,3771.59 U4.42 ; v1@4983.05,4017.95 U2.32
  Bottom Layer w8: v1(4982,4019) 4982,3831 5236,3577 ; 5239,3574 5236,3577 ; v1@5986,3745 5986,3577 5841,3432 5641.2,3432 5556.2,3517 5296,3517 5236,3577
  other v1: 5984,3745
D12: NU1.68 U2.35 U4.45 | length 1658.5
  Top Layer w8: NU1.68 4949.18,3716 5678.4,3716 5686.4,3708 5916,3708 5951.53,3743.53 U4.45 ; v1@5036.5,4016.5 5077.54,4057.54 U2.35 5077.54,4061.54
  Bottom Layer w8: v1(5036,4017) 5034,4015 5034,3823 5139,3718 v1@5152,3718
  other v1: 5152,3717
D13: NU1.77 U2.36 U4.47 | length 1943.3
  Top Layer w8: 4615,3870 4613.5,3868.5 ; NU1.77 4559,3731.82 4559,3814 4613.5,3868.5 ; v1@5051,4005 5109.03,4063.03 U2.36 ; U4.47 5912.16,3765.16 5869,3722 5692.2,3722 5545.7,3868.5 4613.5,3868.5
  Bottom Layer w8: v1@5051,3871 v1(5051,4003)
  other v1: 5049,3869
D14: NU1.78 U2.37 U4.49 | length 1947.9
  Top Layer w8: NU1.78 4536,3727 4536,3814 4616,3894 5540,3894 5698,3736 5741,3736 ; v1(5067,3990) 5075,3998 ; 5072,3995 5075,3998 ; U2.37 5140.53,4063.53 5075,3998 ; 5737,3736 5741,3736 ; U4.49 5871,3811.24 5871,3763 5844,3736 5741,3736
  Bottom Layer w8: v1(5067,3892) v1(5067,3990)
D15: NU1.79 U2.38 U4.51 | length 1908
  Top Layer w8: NU1.79 4516,3719.15 4516,3829 4608,3921 5558,3921 5714,3765 5815,3765 5833.43,3783.43 U4.51 ; v1(5087,3978) 5092,3983 5096,3983 5172.02,4059.02 U2.38
  Bottom Layer w8: v1@5087,3924 v1(5087,3978)
  other v1: 5088,3923
GND: C4.2 C7.1 C9.2 C10.2 C11.2 C12.2 C14.1 C15.1 C16.1 C17.1 C18.1 C19.1 C20.1 C21.2 C22.2 C23.2 C24.2 C25.1 C26.1 C27.1 C50.1 C51.1 D4.2 J1.2 J1.3 NU1.16 NU1.30 NU1.31 NU1.38 NU1.51 NU1.61 NU1.71 NU1.83 NU1.94 NU1.107 NU1.120 NU1.130 NU1.143 P3.2 P6.1 P7.3 P8.4 P8.6 P8.8 P8.10 P8.12 P8.14 P8.16 P8.18 P8.20 P20.4 R7.2 R22.2 R23.2 R24.2 R25.2 REST1.1 U1.15 U2.12 U2.34 U3.1 U4.33 U4.52 U5.13 U5.36 | length 29677.5
  Top Layer w10: U1.15 3209,3220 ; v2(3725,3592) 3725,3613.93 U5.13 ; R7.2 4126.37,3325.36 4219.39,3232.34 NU1.107 ; v2@4084,4361 4024,4301 4024,3826 4231,3619 4231,3586.56 NU1.94 ; v2@4182,2776 4204.05,2776 NU1.120 ; U5.36 4309.91,4196.91 4358,4245 v1(4440,4245) ; P7.3 4522.92,2454.58 NU1.143 4740,2671.66 v2@4740,2708 ; NU1.130 4572,2865.56 4572,2905 v1(4629,2962) ; NU1.83 4759.79,3364 4872,3364 4912,3404 ; v1@4626,2962 v1(4629,2962) ; NU1.71 4842.68,3691.68 4842.68,3693.68 4905,3756 4905,3779 ; 4883.05,3455 NU1.61 ; 4905,3792 4905,3779 ; 4908,3822 4905,3819 4905,3779 ; v3@5010,4025 5046.04,4061.04 U2.34 ; U2.12 C14.1@5014.54,4593.06 ; 5022.24,3315.81 NU1.51 ; NU1.16 4909.4,2936 4883,2936 4882.5,2936.5 4857,2962 v1(4629,2962) ; NU1.31@5220.49,3042.49 5207,3055.99 5207,3138.66 NU1.38 ; U4.52 5813.74,3910.74 v4(5823,3920) ; U4.33 6187.76,3881.76 v1(6188,3882)
  Top Layer w20: P3.2 2935,3212 3010,3287 3142,3287 3209,3220 ; C15.1 3384.6,3734.6 3412,3762 v2(3470,3762) ; C4.2 3753,2818 v2@3906,2971 ; P7.3 4615.55,2310.45 C18.1 ; C10.2 4908,3822 v4@5512,3822 ; v3@4940,4612 C14.1 ; v3(5705,4305) 6141,4305 v2@6228,4218
  Top Layer w30: v2@3864,3479 3922.64,3420.36 R7.2 ; v2(4430,4478) 4430,4723 v2(4431,4724) v2@4432,4725 ; 4883.05,3455 5022.24,3315.81 5198,3140.05 5198,3047.36 5231.08,3014.27 5236.19,3009.17 5299.36,2946 5567,2946 5662,2851 5662,2688 v2@5669,2681 ; C21.2 v2@5330,1662
  Top Layer w50: J1.3@3031,1583 3031,1505 3124,1412 3183,1412 3426,1412 C11.2 3489,1475 C9.2 ; J1.3@3031,1642 3144,1755 3144,1826 ; D4.2 3144,1826 ; P20.4 3295.62,3699 C15.1@3380.6,3699 ; 3948,1845 3948,1802 4085,1665 4139,1665 ; C23.2 4012.4,1870.4 U3.1 3535.28,1826 3144,1826 ; R24.2 R25.2 4139,1665 ; P8.4 P8.6 P8.8 P8.10 P8.12 P8.14 P8.16 P8.18 P8.20 4186,1295 4139,1342 4139,1665 ; v5@5346.4,1316.6 C7.1
  Bottom Layer w10: C16.1 4399.6,4204.6 v1(4440,4245) ; C19.1 4626.11,2962 v1(4629,2962) ; v3@5010,3830 v3(5010,4021) ; v1@6187,3881 6187,3619.6 C20.1
  Bottom Layer w20: P3.2 2857,3212 2915,3270 2915,3716 2973.2,3774.2 P20.4 ; v2@3469,3760 3619,3760 3725,3654 v2(3725,3592) ; v2@3724,3589 3724,3501 ; v2(3864,3480) 3843,3501 3724,3501 ; v2(4083,4358) 4090,4365 4090,4838 ; v2(4184,2775) 4032.69,2926.31 3959.69,2926.31 3724,3162 3724,3501 ; v1(4885,2939) 4885,2912.78 C17.1@4891,2906.78 ; 4928,4838 4937,4829 v3(4937,4613) ; v4(5509,3825) 5732,3825 v4@5827,3920 ; v3@5704,4304 5823,4185 v4(5823,3920)
  Bottom Layer w30: v2@4369,1664 4371,1662 v2(4612,1662) ; C16.1 4303.4,4204.6 4261,4247 4261,4284 4428,4451 v2@4428,4476 ; v2(4431,4724) 4431,4831 ; v2@4615,1662 R22.2
  Bottom Layer w32: REST1.1 5857,2130 C27.1 6006,2286 6053,2333 P6.1
  Bottom Layer w50: P20.4 2984,4010.62 2984,4749 3073,4838 4090,4838 4928,4838 5757,4838 6245,4350 6245,3943 6193.6,3891.6 C20.1 6193.6,3587.4 6264,3517 6391,3517 6484,3424 6484,3122 6402,3040 6134,3040 6100,3006 6100,2891 6188,2803 6188,2697 6163,2672 P6.1 6024,2701 C26.1 ; C17.1 4731,2713 4731,2608 5194.5,2144.5 ; P8.4 5161,1232 5254,1232 5334,1312 5334,1660 5334,1729 5108,1955 C50.1 5108,2058 5194.5,2144.5 ; C26.1@5718,2714 5381,2377 5381,2331 5194.5,2144.5
  other v2: 5332,1660 4361,1664 5668,2683 4741,2704 3907,2974 6230,4217
  other v3: 5011,3830
  other v5: 5339,1317
LED0: NU1.19
LED1: NU1.20
LED2: NU1.21
NetC1_1: C1.1 U1.1 | length 186.8
  Top Layer w15: C1.1 3074,2883.64 U1.1
NetC1_2: C1.2 U1.3 | length 191
  Top Layer w20: C1.2 3259,2912 U1.3
NetC2_2: C2.2 U1.2 | length 267.8
  Top Layer w20: C2.2 3052,3052 3181,3052 3209,3024 U1.2
NetC3_1: C3.1 U1.5 | length 133.6
  Top Layer w20: C3.1@3359,2835 U1.5
NetC3_2: C3.2 U1.4 | length 127.6
  Top Layer w20: C3.2@3309,2841 U1.4
NetC4_1: C4.1 U1.6 | length 189.2
  Top Layer w20: U1.6 3409,2911 C4.1
NetC24_1: C24.1 R14.2 U4.14 | length 433.6
  Top Layer w8: R14.2 5828,2770 5990.9,2932.91 U4.14
  Bottom Layer w8: C24.1 5872,2780 v1(5872,2815)
NetD1_2: D1.2 R1.2 | length 145
  Top Layer w50: D1.2 R1.2@3327,4727
NetD2_2: D2.2 R2.2 | length 140
  Top Layer w50: D2.2 R2.2
NetD3_2: D3.2 R3.2 | length 140
  Top Layer w50: D3.2 R3.2
NetD4_1: D4.1 R6.1 | length 131.2
  Top Layer w30: D4.1 3054,2053 R6.1
NetL1_1: L1.1 NU1.32 NU1.33 | length 280.4
  Top Layer w10: NU1.32 NU1.33 5333.66,2985 5459.4,2985 L1.1
NetP5_2: P5.2 U5.7 | length 866.7
  Top Layer w8: 3695.52,3743.91 U5.7 3695.2,3751.48 3577,3633.28 3577,3491 3915.29,3152.71 P5.2
NetP6_2: P6.2 R15.2 U4.16 | length 424.4
  Top Layer w10: R15.2 P6.2@6051,2770 ; U4.16 6030.27,2794.72 P6.2
NetP8_11: P8.11 R23.1 | length 216.4
  Top Layer w8: R23.1@4615,1577 4698,1494 P8.11
NetP8_17: P8.17 R24.1 | length 177
  Top Layer w20: P8.17 R24.1@4398,1572
NetP8_19: P8.19 R25.1 | length 189.1
  Top Layer w20: R25.1 4298,1553 P8.19
NetP20_2: P20.2 R4.1 | length 142
  Top Layer w15: P20.2 R4.1@3362.37,3951.37
NetP20_3: P20.3 R5.1 | length 163.8
  Top Layer w10: P20.3 3349.37,3872.63 R5.1
NetR7_1: R7.1 R8.2 U5.19 | length 297.4
  Top Layer w8: R7.1 3827,3421 3827,3548.9 U5.19
  Bottom Layer w8: v2(3828,3446) 3828,3415 R8.2
NetR10_1: R10.1 U4.53 | length 223.7
  Top Layer w8: U4.53 5794.06,4024.05 R10.1
NRST: C27.2 NU1.25 P8.15 R16.1 REST1.2 | length 3594.4
  Top Layer w10: NU1.25 5291.95,2804 5350,2804 5453,2907 5531,2907 5585,2853 5585,2705.23 5666.23,2624 v1@5734,2624
  Bottom Layer w10: v1(5733,2624) 5759,2598 5759,2426 R16.1
  Bottom Layer w20: P8.15 4549,1344 4549,1235 4605,1179 5463,1179 5664.99,1380.99 REST1.2 REST1.2@5691.55,2192.55
  Bottom Layer w30: REST1.2@5691.55,2192.55 5770,2271 R16.1
OSCIN: C25.2 NU1.23 Y2.2 | length 489.8
  Top Layer w10: NU1.23 5357.7,2682.58 Y2.2
  Bottom Layer w20: Y2.2 5435.36,2626.8 C25.2@5435.36,2554.64
OSCOUT: C26.2 NU1.24 Y2.1 | length 611.5
  Top Layer w10: NU1.24 5299.11,2769 5466,2769 Y2.1
  Bottom Layer w20: Y2.1 5608,2824 C26.2@5654.36,2777.64
PA0: NU1.34
PA1: NU1.35
PA2: NU1.36
PA3: NU1.37
PA4: NU1.40
PA5: NU1.41
PA6: NU1.42
PA7: NU1.43
PA8: NU1.100
PA9: NU1.101 U1.11 | length 2103.2
  Top Layer w10: v1(3381,3280) 3409,3252 U1.11 ; v1@3984,3642 3984,3638.69 NU1.101
  Bottom Layer w10: v1@3381,3279 v1(3381,3280) 3381,4030 3396,4045 3579,4045 v1(3982,3642)
PA10: NU1.102 U1.12 | length 2067.7
  Top Layer w10: 3359,3123 U1.12 3359,3297 3383,3321 v2(3416,3321) ; v1(3965,3623) 3975.78,3623 4292.92,3305.87 NU1.102
  Bottom Layer w10: v2@3415,3324 3424,3333 3424,3973 3454,4003 3585,4003 v1(3965,3623)
PA11: NU1.103 R4.2 | length 1090.7
  Top Layer w10: R4.2 3532,3965 v1(3542,3955) ; v1@4016.01,3551 NU1.103
  Bottom Layer w10: v1@3542,3952 3550,3952 3910,3592 3975,3592 v1(4015,3552)
PA12: NU1.104 R5.2 | length 1038.6
  Top Layer w10: R5.2 3465,3849 v1(3559,3849) ; v1(3995,3523) 4016.18,3523 NU1.104
  Bottom Layer w10: v1@3560,3849 3598,3849 3896,3551 3967,3551 v1(3995,3523)
PA13: NU1.105 P8.7 R21.1 | length 2534.7
  Top Layer w10: NU1.105 4314.34,3197 v2(4355,3197) ; R21.1 4872,1484 ; P8.7 4872,1421 4872,1484 ; v2(5027,1486) 4874,1486 4872,1484
  Bottom Layer w10: v2(4355,3197) 4338,3197 4325,3184 4325,2798 4807,2316 4807,2134 5068,1873 5068,1525 v2@5027,1484
PA14: NU1.109 P8.9 R20.1 R22.1 | length 2530.7
  Top Layer w8: v2@3962.91,2841.09 NU1.109
  Top Layer w15: R20.1 4751,1442 P8.9
  Bottom Layer w15: v2(3961,2843) 3961,2840.77 4814,1987.77 P8.9@4814,1411 ; R22.1 4749,1444 P8.9
PA15: NU1.110 P8.5 R19.1 | length 2194.2
  Top Layer w8: v2@3991,2841.34 4108.33,2958.67 ; 4105.66,2956 4108.33,2958.67 ; NU1.110 4108.33,2958.67
  Bottom Layer w15: v2(3994,2841) 4998,1837 P8.5
  other v2: 4999,1564
PB0: NU1.46
PB1: NU1.47
PB2: NU1.48
PB3: NU1.133 P8.13 | length 1567.9
  Top Layer w8: 4346,2556 4318,2528 4318,2003 4480,1841 4480,1587 4598,1469 P8.13 ; 4346,2556.05 NU1.133
PB4: NU1.134 P8.3 R18.1 | length 2128.5
  Top Layer w8: NU1.134 4354.4,2536.6 4354.4,2013.6 4624,1744 4985,1744 5063,1666 5063,1430 P8.3 5111,1408 R18.1
PB5: NU1.135
PB6: NU1.136
PB7: NU1.137
PB8: NU1.139
PB9: NU1.140
PB10: NU1.69
PB11: NU1.70
PB12: NU1.73
PB13: NU1.74
PB14: NU1.75
PB15: NU1.76
PC0: NU1.26
PC1: NU1.27
PC2: NU1.28
PC3: NU1.29
PC4: NU1.44
PC5: NU1.45
PC6: NU1.96 R1.1 | length 1831.2
  Top Layer w10: R1.1@3421,4731 v1(3541,4731) ; v1(4037,3690) 4071.89,3690 NU1.96
  Bottom Layer w10: v1@3543,4731 3980,4294 3980,3747 v1(4037,3690)
PC7: NU1.97 R2.1 | length 1663.6
  Top Layer w10: R2.1@3411,4535 v1(3550,4535) ; v1(4023,3670) 4026,3670 4034,3662 4072.05,3662 NU1.97
  Bottom Layer w10: v1@3551,4536 3956,4131 3956,3737 v1(4023,3670)
PC8: NU1.98 R3.1 | length 1550.3
  Top Layer w10: R3.1@3418,4356 v1(3569,4356) ; v1(4000,3657) 4000,3655 4020,3635 4071.21,3635 NU1.98
  Bottom Layer w10: v1@3567,4354 3651,4354 3932,4073 3932,3725 v1(4000,3657)
PC9: NU1.99
PC10: NU1.111
PC11: NU1.112
PC12: NU1.113
PC13: NU1.7
PC14: C50.2 NU1.8 Y1.2 | length 717.9
  Top Layer w10: NU1.8 5028,2594.69 5028,2323 Y1.2
  Bottom Layer w20: Y1.2 5044.36,2163.8 C50.2
PC15: C51.2 NU1.9 Y1.1 | length 578.1
  Top Layer w10: NU1.9 5098,2552.53 Y1.1
  Bottom Layer w20: Y1.1 5163.36,2327.64 C51.2
PD2: NU1.116
PD3: NU1.117
PD4: NU1.118 U2.41 U4.34 U5.8 | length 5996.7
  Top Layer w8: v2(3650,3678) 3709.44,3737.44 U5.8 3969,3997.13 3969,4333 4076,4440 4587,4440 4668,4521 4668,4644 4771,4747 v1@5244,4747 ; v1@4125,2756 4129,2756 4150,2777 4150,2777.63 NU1.118 ; U2.41 5266.51,4030.49 5274,4023 ; v1@5266.51,4237.51 5308,4279 6113,4279 6173,4219 6173,3888.21 6172.76,3887.97 6172.76,3817.72 U4.34 ; 5463,4283 v1(5463,4530)
  Bottom Layer w8: v2@3651,3683 3651,3107 3879,2879 3996,2879 4121,2754 v1@4125,2754 ; v1(5246,4747) v1(5463,4530) v1@5465,4528 ; v1@5270,4021 v1(5270,4237)
  other v1: 4125,2755 5269,4024
PD5: NU1.119 U2.17 U4.13 U5.18 | length 4701.8
  Top Layer w8: NU1.119 4391,2990.79 4391,3025 4260,3156 4007,3156 3806,3357 3806,3555.74 U5.18 4001,3750.74 4001,4322 4098,4419 4797,4419 ; 4794,4416 4797,4419 ; U2.17 4857.06,4479.06 4797,4419 ; v1@5880,2852.2 5891,2863.2 5891,2864 5971.22,2944.22 U4.13
  Bottom Layer w8: v1@4371,3044 4378,3037 5632,3037 5766,2903 v1@5932,2903
  other v1: 5879,2851 5932,2904 4371,3047
PD6: NU1.122 P5.1 R13.2 U4.17 | length 2857.4
  Top Layer w8: R13.2 3977,2722 3911,2788 3911,2936 P5.1 ; R13.2@3980,2689 4153,2689 ; 4149,2689 4153,2689 ; v1@4787,3112 4783,3108 4591.73,3108 NU1.122 4172.73,2689 4153,2689 ; v1@6049.96,2919.96 U4.17
  Bottom Layer w8: v1(4785,3109) 5584,3109 5772,2921 6047,2921 v1(6049,2919)
PD7: NU1.123 U5.9 | length 2026.6
  Top Layer w8: v1(3671,3650) 3671,3671.29 U5.9 ; v1@4243,2729 4243,2731.44 NU1.123 4404.71,2892.71 4601,3089 v1@4781,3089
  Bottom Layer w8: v1@3673,3648 3680,3641 3680,3142 3926,2896 4005.21,2896 4140,2761.21 4140,2760 4171,2729 v1(4242,2729)
  other v1: 4784,3090
PE0: NU1.141 U2.39 | length 4089
  Top Layer w8: v1@4530.66,2518 NU1.141 ; U2.39 v1@5203.52,4151.48
  Bottom Layer w8: v1(4528,2518) 4078,2968 4078,4249 4359,4530 4620,4530 4633,4543 4633,4737 4669,4773 4792,4773 4885,4680 4885,4623.2 4837,4575.2 4837,4417 5101,4153 v1(5203,4153)
PE1: NU1.142 U2.40 | length 4238.9
  Top Layer w8: v1@4523,2482.5 NU1.142 ; U2.40 v1@5235.02,4155.98
  Bottom Layer w8: v1(4526,2483) 4056,2953 4056,4263 4346,4553 4611,4553 4617,4559 4617,4769 4644,4796 4796,4796 4905,4687 4905,4623.4 4867,4585.4 4867,4427 5106,4188 5204,4188 v1(5234,4158)
PF6: NU1.18
PF10: NU1.22
PF11: NU1.49
PG6: NU1.91 P5.3 R12.1 | length 1439.9
  Top Layer w10: R12.1 3690.16,2998 3783.58,3091.42 ; P5.3 3783.58,3091.42 ; v1(4159,3088) 3991,3088 3904,3001 3861,3001 3783.58,3078.42 3783.58,3091.42 ; v1@4323,3534 4367.08,3534 NU1.91
  Bottom Layer w10: v1@4160,3087 4160,3200 ; 4160,3194 4160,3200 ; v1(4322,3533) 4160,3371 4160,3200
PG7: NU1.92
PG8: NU1.93
PG9: NU1.124 R11.1 U4.32 | length 3261.2
  Top Layer w8: v2@4057,2586 4125.4,2586 NU1.124 4612.4,3073 4731,3073 v1(4735,3069) ; v1(6149,3727) 6167,3727 6207.44,3767.44 U4.32
  Bottom Layer w8: v1(4735,3069) 4735,3100 4759,3124 5595,3124 5780,2939 5887,2939 6148,3200 6148,3726 v1(6149,3727)
  Bottom Layer w20: R11.1 4020,2550 v2(4056,2586)
PG10: NU1.125 R9.1 U2.6 | length 3729.8
  Top Layer w8: R9.1 4119,2553 4332,2766 4332,2764.76 ; 4330.24,2763 4332,2764.76 ; NU1.125@4437.45,2864.87 NU1.125 4332,2764.76 ; v1(4864,4659) 5138,4659 5203.52,4593.48 U2.6
  Bottom Layer w8: v1@4325,2759 4316,2759 4099,2976 4099,4224 4385,4510 4638,4510 4662,4534 4662,4727 4688,4753 4773,4753 v1@4864,4662
  other v1: 4323,2758
PG11: NU1.126 P1.4 | length 1843
  Top Layer w10: v1@4003,2489 4084.08,2489 NU1.126
  Bottom Layer w10: P1.4 2866,2499 3993,2499 v1(4001,2491)
PG12: NU1.127 P1.3 | length 1833
  Top Layer w10: v1@3999,2465 4087.92,2465 NU1.127
  Bottom Layer w10: P1.3 2799,2466 v1(4000,2466)
PG13: NU1.128 P1.2 | length 1889.2
  Top Layer w10: v1@3995,2443 v1(3996,2443) 4092,2443 4472.11,2823.11 NU1.128
  Bottom Layer w10: P1.2 2830,2421 ; 2842,2433 2830,2421 ; v1(3996,2443) 2852,2443 2830,2421
PG14: NU1.129 P1.1 | length 1922.8
  Top Layer w10: v1@3993,2419 v1(3995,2419) 4093.67,2419 4483.86,2809.19 NU1.129
  Bottom Layer w10: P1.1 2928,2419 v1(3995,2419)
PG15: NU1.132
R1IN: P3.1 U1.13 | length 581.4
  Top Layer w20: v2@3309,3092 U1.13
  Bottom Layer w30: P3.1@2809,3091 v2(3309,3091)
T1OUT: P3.3 U1.14 | length 579.6
  Top Layer w20: P3.3@2771,3320 3165,3320 3259,3226 U1.14
"USB 5V": P20.1
VDD5: C2.1 C9.1 C11.1 J1.1 U1.16 U3.3 | length 2556.9
  Top Layer w20: U1.16 3096.64,3111 C2.1 2973,3111 2910,3048 2910,2636 3290,2256 3424,2256 v5(3576,2104) v5@3579.68,2100.32
  Top Layer w40: U3.3 v5@3579.68,2100.32
  Top Layer w50: J1.1@3283,1583 C9.1@3608,1583
  Bottom Layer w40: J1.1@3283,1642 3574,1933 v5@3574,2104
VDD33: C7.2 C10.1 C12.1 C14.2 C15.2 C16.2 C17.2 C18.2 C19.2 C20.2 C21.1 C22.1 C23.1 D1.1 D2.1 D3.1 L1.2 NU1.17 NU1.39 NU1.52 NU1.62 NU1.72 NU1.84 NU1.95 NU1.108 NU1.121 NU1.131 NU1.144 P7.1 P8.1 P8.2 R6.2 R8.1 R9.2 R10.2 R11.2 R12.2 R13.1 R14.1 R15.1 R16.2 R18.2 R19.2 R20.2 R21.2 U2.11 U2.33 U3.2 U4.29 U4.43 U5.12 U5.37 | length 29902
  Top Layer w10: v1@3635.23,3552 U5.12 ; v4@3970,2779 4028,2721 4176.89,2721 NU1.121 4419,2963.11 4419,3041 4287,3173 4254.82,3173 NU1.108 4169.82,3258 v1@3991,3258 ; v4@4176,3613.73 NU1.95 ; v4(4221,3930) 4221,4137.77 U5.37 4349,4265.77 4349,4266 4361,4278 v1(4445,4278) ; P7.1@4330,2599 4512.35,2781.35 NU1.131 4519.56,2781.35 4663.21,2925 v1@4665,2925 ; v4@4369,4000 v4@4373,3996 ; v4@4403,3816 4403,3692.95 NU1.84 ; C18.2 4668.45,2572.27 NU1.144 ; C10.1 4711.02,3822 NU1.72 4790,3668.18 4790,3559 4850,3499 4899.21,3499 NU1.62 ; v1@4908,2967 5050.13,2824.87 NU1.17 5053.89,2823.11 5281,2596 5755,2596 5806,2647 R14.1 ; U2.11 C14.2@5046.04,4587.64 ; NU1.52 5109.74,3427.21 5153.53,3471 5517.21,3471 5579.21,3409 5579.21,3380.21 5431.5,3232.5 5419.5,3232.5 ; NU1.39 5329.5,3289 5363,3289 5419.5,3232.5 ; L1.2 5494,3158 5419.5,3232.5 ; R10.2 5923,4123 5990.9,4055.09 U4.43 ; v4@6266.49,3702.49 U4.29
  Top Layer w14: v2@5563,4554 5445.82,4554 5327.82,4436 5263,4436 5190,4363 5190,4264 5255,4199 5297,4199 5338,4240 5686,4240 R10.2 ; v2(5563,4736) 5563,4799
  Top Layer w15: v4@4373,3996 4403,3966 4403,3858 v4@4403,3816 ; 4413,3909 4463,3909 4532,3978 4532,3996 ; 4532,3987 4532,3996 ; 4826,4151 4774,4203 4625,4203 4532,4110 4532,3996
  Top Layer w20: v4@4499,4465 v4(4499,4466) 4499,4804 ; v4@4626,3818 4705,3818 C10.1 ; 4826,4151 4975.42,4151 5014.54,4111.88 U2.33 ; C14.2 5072.4,4610 v4(5126,4610) ; L1.2 5496.94,3094.4 5695,2896.34 5695,2756 5771,2680 R14.1 R15.1
  Top Layer w30: D1.1 3092,4404 2982,4294 2982,4162 ; C15.2 3459.4,3505.4 3396.5,3442.5 3393.5,3442.5 ; R12.2 3600,3236 3393.5,3442.5 ; C22.1@3887,1989 3887,2375 ; v4@3887,2747 R13.1 R9.2 3887,2375 ; C23.1 3642,1986 3620.89,1964.89 U3.2 3551.11,1964.89 3424,2092 3183,2092 R6.2 3147,2289.46 2737.47,2698.98 2737.47,4044.47 2855,4162 2982,4162 ; 4309,2574 4309,2571 4113,2375 3887,2375 ; C18.2 4732,2290.89 4732,2125 4987.5,1869.5 ; R20.2 R19.2@4986,1665 ; v2(4930,1785) 4930,1812 4987.5,1869.5 ; P8.2 P8.1 ; C7.2@5434.4,1395 P8.1 ; C7.2 5741.4,1391.4 5959,1609 v6(5959,2412) ; v4(5936,2616) R15.1@5936,2673 ; 2982,4162 2982,3538 3026,3494 3342,3494 3393.5,3442.5 ; 4987.5,1869.5 5111,1746 R18.2 5198,1573 P8.1
  Top Layer w40: D1.1 3169,4804 4499,4804 6171,4804 6492,4483 6492,2569 6335,2412 v6(5959,2412)
  Bottom Layer w10: v1@3466,3551 3632,3551 v1(3633,3550) ; R8.1@3931,3321 v1(3995,3257) ; v4(4178,3617) 4157,3638 4157,3869 4267.5,3979.5 ; v4(4221,3930) 4221,3932 4268,3979 4348,3979 v4(4370,4001) ; C19.2 4661,2891.11 v1(4661,2924) 4707,2970 4906,2970 v1(4907,2969) 4925.89,2969 C17.2
  Bottom Layer w14: v2(5564,4547) v2@5564,4736
  Bottom Layer w20: C16.2 4496.6,4279.4 ; v4@4403,3817 v4(4626,3817) ; v4(4499,4466) 4499,4185 v4@4553,4131 ; v4@5124,4610 v4(5124,4790)
  Bottom Layer w30: v4(3887,2749) 3941,2749 v4(3972,2780) ; R11.2@3889,2551 v2(3889,2619) ; C19.2 C19.2@4647.55,2868.55 ; v2(4932,1662) v2@4932,1782 ; R16.2 5936,2491 v4@5936,2614 ; v4(6266,3702) v4@6268.4,3702 ; C20.2 v4@6268.4,3702 ; v4@6268.4,3704.4 v4@6268.4,3702 ; 6491,3702 v4@6268.4,3702
  Bottom Layer w40: R16.2 5962,2415 v6@5964,2417
  other v1: 3466,3548
  other v4: 6480,3702 4402,3816 4555,4131
pads on no net: NU1.6 NU1.106 P20.5 P20.6 REST1.3 REST1.4 U1.7 U1.8 U1.9 U1.10 U4.1 U4.27 U4.28 U4.30 U4.55 U4.56 U5.1 U5.2 U5.3 U5.4 U5.5 U5.6 U5.10 U5.11 U5.14 U5.15 U5.20 U5.21 U5.22 U5.23 U5.24 U5.25 U5.26 U5.27 U5.28 U5.33 U5.34 U5.35 U5.38 U5.39 U5.40 U5.45 U5.46 U5.47 U5.48

## Keep-outs
Keep-Out Layer:
  lines w10: 2692,4874 6653,4874 6656,4871 ; 2694,4876 2694,1150 6603,1150 6656,1203 6656,1393 ; 6658,1389 6658,4879

## Text inside footprints (layer, text, board x,y; h text height)
P8: Top Overlay "20" at 4238,1315 h35 r180; Top Overlay "19" at 4238,1415 h35 r180; Top Overlay "1" at 5298,1415 h35 r180; Top Overlay "2" at 5298,1315 h35 r180